# Altium PCB NUC970 DEV BOARD 1M52 LCD-20141215.PcbDoc
Units mil, origin at the board's own origin, x right, y up, seen from the top; angles counter-clockwise.
Board outline 5511.81 x 4015.75 mil, 2 copper layers (Top, Bottom), stack 12.7 mil thick; 39 components, 48 nets, 213 pads, 574 vias.
Unrouted connection lines stored in the file: 539.
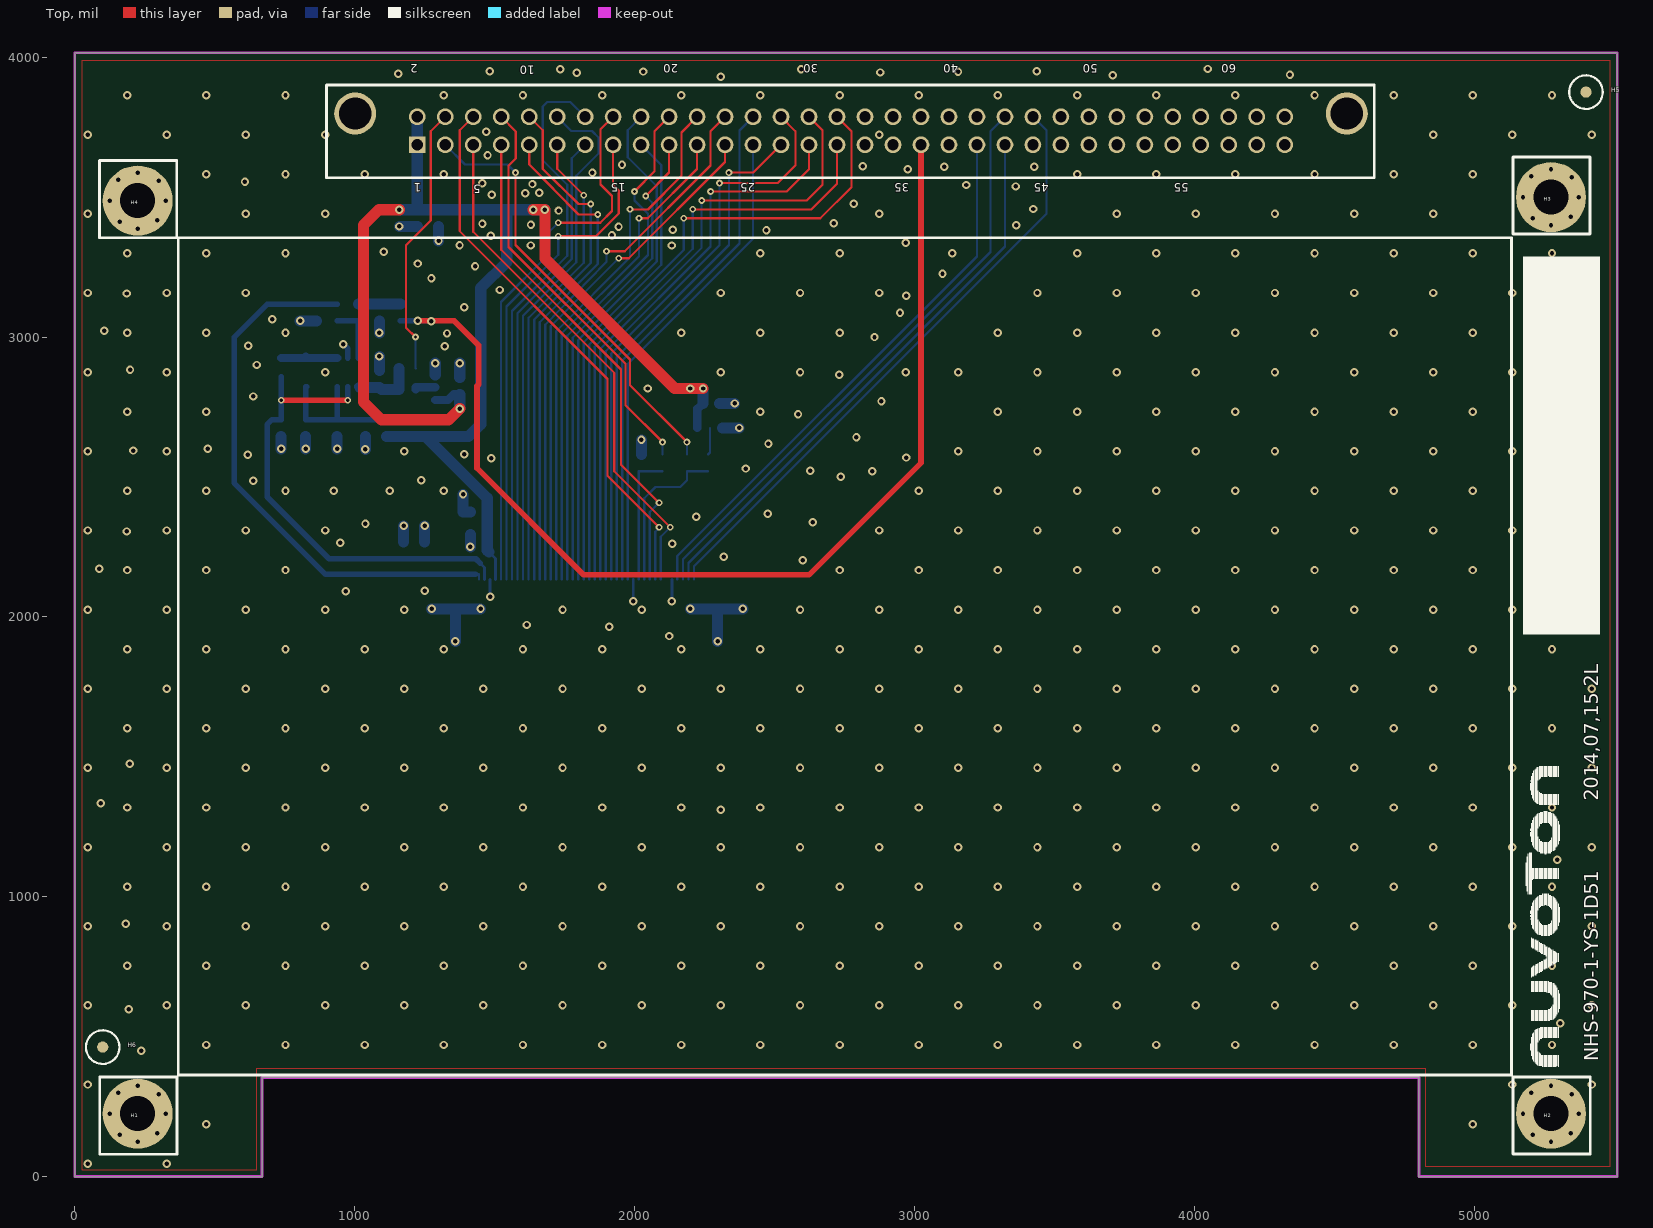
[diagram p0: Top view]
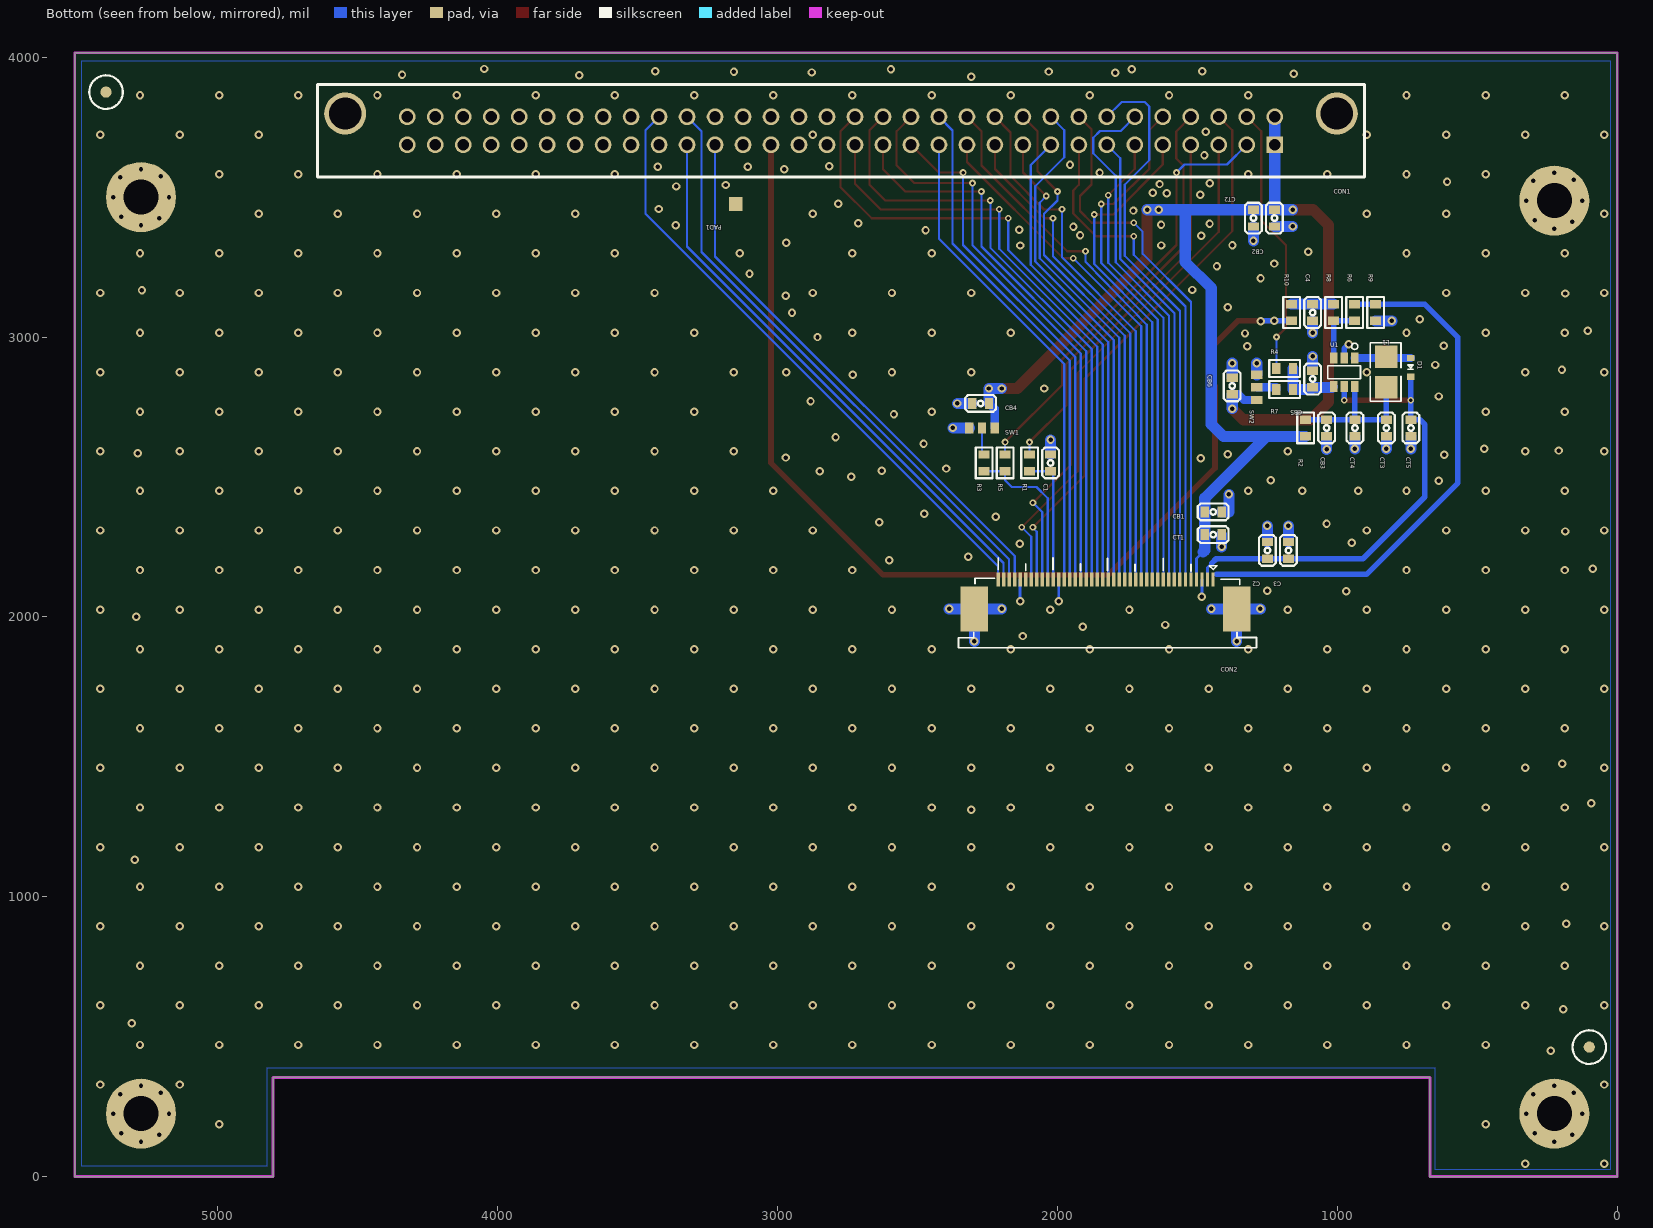
[diagram p1: Bottom view, seen from below]

## Layer stack, top to bottom
Solder Mask Top: solder mask 0.4, Solder Resist, Dk 3.5
Top: signal copper 1.35
Dielectric 1: dielectric 10, FR-4, Dk 4.3
Bottom: signal copper 1.35
Solder Mask Bottom: solder mask 0.4, Solder Resist, Dk 3.5

## Board outline
5511.81,0 5511.81,4015.75 0,4015.75 0,0 669.29,0 669.29,354.33 4803.15,354.33 4803.15,0

## Design rules (kind name [scope] priority, off if disabled: settings)
Clearance "Clearance - Default - DEFAULT - Via" [IsVia vs IsVia] p1: gap=6 ignorepadtopadclearanceinfootprint=FALSE
Clearance "Clearance - Default - DEFAULT- SMD" [IsVia vs IsSMTPin] p2: gap=6 ignorepadtopadclearanceinfootprint=FALSE
Clearance "Clearance - Default - DEFAULT - Net" [All] p3: gap=7 ignorepadtopadclearanceinfootprint=FALSE except(0: Arc-Hole Track-Hole SMDPad-Hole THPad-Hole Via-Hole Fill-Hole Poly-Hole Region-Hole Text-Hole; 10: Arc-Fill Arc-Poly Arc-Region Track-Fill Track-Poly Track-Region SMDPad-Fill SMDPad-Poly SMDPad-Region THPad-Fill THPad-Poly THPad-Region Via-Fill Via-Poly Via-Region Fill-Fill Fill-Poly Fill-Region Poly-Poly Poly-Region Region-Region Text-Text)
ComponentClearance "ComponentClearance - Default - DEFAULT" [All] p1: gap=6 collisioncheckmode=3 verticalgap=10 showdistances=FALSE
FanoutControl Fanout_SOIC [IsSOIC] p1: bgadir=Out bgaviamode=Centered fanoutstyle=Auto fanoutdirection=Alternating viagrid=1 // Fanout_SOIC (Default Rule)
FanoutControl Fanout_Small [(CompPinCount < 5)] p2: bgadir=Out bgaviamode=Centered fanoutstyle=Auto fanoutdirection=OutThenIn viagrid=1 // Fanout_Small (Default Rule)
FanoutControl Fanout_LCC [IsLCC] p3: bgadir=Out bgaviamode=Centered fanoutstyle=Auto fanoutdirection=Alternating viagrid=1 // Fanout_LCC (Default Rule)
FanoutControl Fanout_BGA [IsBGA] p4: bgadir=Out bgaviamode=Centered fanoutstyle=Auto fanoutdirection=Alternating viagrid=1 // Fanout_BGA (Default Rule)
HoleToHoleClearance "HoleToHoleClearance - Default - DEFAULT" [All] p1: gap=6 allowstackedmicrovias=TRUE
Length "Default Length" [All] p1: maxlimit=50000 minlimit=0
MaxMinImpedance "Default Impedance" [All] p1: minimum=50.00 maximum=150.0
ParallelSegment "Default Parallel Segment Adjasent" [All] p1: limit=1000 gap=200
ParallelSegment "Default Parallel Segment Same Layer" [All] p2: limit=1000 gap=200
PlaneConnect "Default PlaneConnect" [All] p1: planeconnectstyle=Relief reliefexpansion=20 reliefentries=0 reliefconductorwidth=15 reliefairgap=10
PolygonConnect "PolygonConnect - Default SMT" [IsSMTPin] p1: connectstyle=Relief reliefconductorwidth=10 reliefentries=4 polygonreliefangle="45 Angle" airgapwidth=10
PolygonConnect "PolygonConnect - Default Pad" [All] p2: connectstyle=Relief reliefconductorwidth=15 reliefentries=4 polygonreliefangle="45 Angle" airgapwidth=10
RoutingLayers "RoutingLayers - Default - DEFAULT" [All] p1: top layer_v5=TRUE bottom layer_v5=TRUE
RoutingPriority "RoutingPriority - Default - DEFAULT" [All] p1: routingpriority=3
RoutingTopology "Default Routing Topology" [All] p1: topology=Shortest
RoutingVias "RoutingVias - NetClass - POWER" [InNetClass('POWER') vs InNetClass('POWER')] p1: holewidth=16 width=30 viastyle="Through Hole" minholewidth=16 minwidth=30 maxholewidth=16 maxwidth=30
RoutingVias "RoutingVias - Default - DEFAULT" [All] p2: holewidth=12 width=24 viastyle="Through Hole" minholewidth=12 minwidth=24 maxholewidth=12 maxwidth=24
SMDToCorner "SMDToCorner - Default - DEFAULT" [All] p1: distance=60000
SolderMaskExpansion "SolderMaskExpansion from CAM settings" [All] p1: expansion=2
Width "Width - NetClass - POWER" [InNetClass('POWER')] p1: maxlimit=100 minlimit=1 preferedwidth=40
Width "Default Width" [All] p2: maxlimit=100 minlimit=1 preferedwidth=8
18 further rules are at their usual default settings.

## Classes and differential pairs
net class POWER: PWM VD33 VS

## Components (designator, comment, footprint, x,y, rotation, side; value= is the part's Value field where it differs from the comment)
C1 "C0603" C0603 2025,2550 r90 bottom
C2 "C0603" C0603 1250,2237.5 r90 bottom
C3 "C0603" C0603 1175,2237.5 r270 bottom
C4 "C0603" C0603 1088.5,3087.5 r90 bottom
CB1 "C0603" C0603 1443.75,2375 r180 bottom
CB2 "C0603" C0603 1225,3425 r270 bottom
CB3 "C0603" C0603 1038.5,2675 r270 bottom
CB4 "C0603" C0603 2275,2762.5 r0 bottom
CB5 "C0603" C0603 1088.5,2850 r90 bottom
CB6 "C0603" C0603 1376,2825 r90 bottom
CON1 "F_DIN_32X2$2F$2.54A" F_DIN_32X2$2F$2.54A 2773.78,3736.71 r0 bottom
CON2 "CON0.5MMX40" CON0.5MMX40 1828.54,2133.86 r0 bottom
CT1 "C0603" C0603 1443.75,2293.75 r180 bottom
CT2 "C0603" C0603 1300,3425 r270 bottom
CT3 "C0603" C0603 825,2675 r270 bottom
CT4 "C0603" C0603 937.5,2675 r270 bottom
CT5 "C0603" C0603 737.5,2675 r270 bottom
D1 "DIDEO_A" DIDEO_A 738.5,2925 r270 bottom
H1 "H-250" H-250 225,225 r0 top
H2 "H-250" H-250 5275,225 r0 top
H3 "H-250" H-250 5275,3500 r0 top
H4 "H-250" H-250 225,3487.5 r0 top
H5 "VIA40N(F_MASK)2L" VIA40N(F_MASK)2L 5400,3875 r0 top
H6 "VIA40N(F_MASK)2L" VIA40N(F_MASK)2L 100,462.5 r0 top
L1 "L1008" L1008 826,2875 r90 bottom
PAD1 "1PAD_1.25X1.25MM" 1PAD_1.25X1.25MM 3150,3475 r90 bottom
R1 "R0603" R0603 2100,2550 r90 bottom
R2 "R0603" R0603 1113.5,2675 r270 bottom
R3 "R0603" R0603 2262.5,2550 r90 bottom
R4 "R0603" R0603 1188.5,2887.5 r0 bottom
R5 "R0603" R0603 2187.5,2550 r90 bottom
R6 "R0603" R0603 938.5,3087.5 r270 bottom
R7 "R0603" R0603 1188.5,2812.5 r0 bottom
R8 "R0603" R0603 1013.5,3087.5 r90 bottom
R9 "R0603" R0603 863.5,3087.5 r90 bottom
R10 "R0603" R0603 1163.5,3087.5 r90 bottom
SW1 "PAD3P" PAD3P 2225,2675 r0 bottom
SW2 "PAD3P" PAD3P 1288.5,2775 r90 bottom
U1 "SOT-23-6" SOT-23-6 938.5,2925 r0 bottom

## Footprints (in the part's own frame and the unit in brackets; to place one, negate y for a bottom-side part, rotate by r counter-clockwise, add the part's x,y. Pads: shape width x height; smd on the part's side, far side on the other; paste and mask are expansions set on the pad)
1PAD_1.25X1.25MM [mm]
  rect 1.25x1.25 smd: \(0,0)
C0603 [mil]
  rect 30x40 smd: 1(-30,0) 2(30,0)
  silkscreen extent -55,-30 55,30
CON0.5MMX40 [mm]
  rect 0.3x1.25 smd: 1(-9.75,0) 2(-9.25,0) 3(-8.75,0) 4(-8.25,0) 5(-7.75,0) 6(-7.25,0) 7(-6.75,0) 8(-6.25,0) 9(-5.75,0) 10(-5.25,0) 11(-4.75,0) 12(-4.25,0) 13(-3.75,0) 14(-3.25,0) 15(-2.75,0) 16(-2.25,0) 17(-1.75,0) 18(-1.25,0) 19(-0.75,0) 20(-0.25,0) 21(0.25,0) 22(0.75,0) 23(1.25,0) 24(1.75,0) 25(2.25,0) 26(2.75,0) 27(3.25,0) 28(3.75,0) 29(4.25,0) 30(4.75,0) 31(5.25,0) 32(5.75,0) 33(6.25,0) 34(6.75,0) 35(7.25,0) 36(7.75,0) 37(8.25,0) 38(8.75,0) 39(9.25,0) 40(9.75,0)
  rect 2.5x4.1 smd: 41(-11.9,2.675) 42(11.9,2.675)
  silkscreen extent -13.7,-1.97 13.35,6.2
DIDEO_A [mil]
  rect 23x27 smd: 1(0,0) 2(67,0)
  silkscreen extent 25,-10 40,10
F_DIN_32X2$2F$2.54A [mil]
  rect 60x60 / inner round 60 / far side rect 60x60 hole 40: 1(-1550,50)
  round 60 hole 40: 2(-1550,-50) 3(-1450,50) 4(-1450,-50) 5(-1350,50) 6(-1350,-50) 7(-1250,50) 8(-1250,-50) 9(-1150,50) 10(-1150,-50) 11(-1050,50) 12(-1050,-50) 13(-950,50) 14(-950,-50) 15(-850,50) 16(-850,-50) 17(-750,50) 18(-750,-50) 19(-650,50) 20(-650,-50) 21(-550,50) 22(-550,-50) 23(-450,50) 24(-450,-50) 25(-350,50) 26(-350,-50) 27(-250,50) 28(-250,-50) 29(-150,50) 30(-150,-50) 31(-50,50) 32(-50,-50) 33(50,50) 34(50,-50) 35(150,50) 36(150,-50) 37(250,50) 38(250,-50) 39(350,50) 40(350,-50) 41(450,50) 42(450,-50) 43(550,50) 44(550,-50) 45(650,50) 46(650,-50) 47(750,50) 48(750,-50) 49(850,50) 50(850,-50) 51(950,50) 52(950,-50) 53(1050,50) 54(1050,-50) 55(1150,50) 56(1150,-50) 57(1250,50) 58(1250,-50) 59(1350,50) 60(1350,-50) 61(1450,50) 62(1450,-50) 63(1550,50) 64(1550,-50)
  round 150 hole 115: 65(-1771.65,-61.81) 66(1771.65,-61.81)
  silkscreen extent -1870,-165 1870,165
H-250 [mil]
  round 250 / inner round 200 / far side round 250 hole 125 unplated: 1(0,0)
  round 40 hole 16: 2(-100,0) 3(100,0) 4(0,100) 5(0,-100) 6(-65,-75) 7(70,-70) 8(-70,75) 9(75,70)
L1008 [mil]
  rrect0% 80x80 smd: 1(-55,0) 2(55,0)
  silkscreen extent -105,-53 105,57
PAD3P [mil]
  rect 30x40 smd: 1(0,0) 2(45,0) 3(90,0)
R0603 [mil]
  rect 30x40 smd: 1(-30,0) 2(30,0)
  silkscreen extent -55,-30 55,30
SOT-23-6 [mil]
  rect 27x39 smd: 1(0,0) 2(37.4,0) 3(74.8,0) 4(74.8,101.97) 5(37.4,102.36) 6(0,102.36)
  silkscreen extent -21,-53 96,74
VIA40N(F_MASK)2L [mil]
  round 40 / inner round 100 / far side round 40 all layers, no hole: 1(0,0)
  Top pour cut-out: 75,0 69.29,28.7 53.03,53.03 28.7,69.29 0,75 0,75 -28.7,69.29 -53.03,53.03 -69.29,28.7 -75,0 -75,0 -69.29,-28.7 -53.03,-53.03 -28.7,-69.29 0,-75 0,-75 28.7,-69.29 53.03,-53.03 69.29,-28.7 75,0
  Bottom pour cut-out: 75,0 69.29,28.7 53.03,53.03 28.7,69.29 0,75 0,75 -28.7,69.29 -53.03,53.03 -69.29,28.7 -75,0 -75,0 -69.29,-28.7 -53.03,-53.03 -28.7,-69.29 0,-75 0,-75 28.7,-69.29 53.03,-53.03 69.29,-28.7 75,0
  silkscreen extent -60,-60 60,60

## Via types
v1: diameter 30, hole 16, Top to Bottom, 548 vias
v2: diameter 24, hole 12, Top to Bottom, 26 vias

## Nets (pads, with @x,y where several pads share a name; then routed paths per layer and width w, separated by ;. In a path a pad name is that pad's centre, name@x,y a point inside that pad or via, vN(x,y) a via of type N, cw(c..) or ccw(c..) an arc to the next point about the centre after c; other vN are vias at no path point)
B0: CON1.32 CON2.21 | length 2348.7
  Top w8: v2(2176,3424) 2664,3424 2776,3536 2776,3734.49 CON1.32
  Bottom w8: CON2.21 1838.39,2972.94 2176,3310.56 v2(2176,3424)
B1: CON1.31 CON2.22 | length 2159.8
  Top w8: v2(2208,3456) 2632,3456 2723.78,3547.78 CON1.31
  Bottom w8: CON2.22 1858.07,2964.94 2208,3314.87 v2(2208,3456)
B2: CON1.30 CON2.23 | length 2222.1
  Top w8: v2(2240,3488) 2616,3488 2672,3544 2672,3738.49 CON1.30
  Bottom w8: CON2.23 1877.76,2956.94 2240,3319.19 v2(2240,3488)
B3: CON1.29 CON2.24 | length 2013
  Top w8: v2(2272,3520) 2544,3520 2623.78,3599.78 CON1.29
  Bottom w8: CON2.24 1897.44,2948.94 2272,3323.5 v2(2272,3520)
B4: CON1.28 CON2.25 | length 2068.7
  Top w8: v2(2304,3550) 2512.5,3550 2575,3612.5 2575,3735.49 CON1.28
  Bottom w8: CON2.25 1917.13,2940.94 2304,3327.82 v2(2304,3550)
B5: CON1.27 CON2.26 | length 1847
  Top w8: v2(2337.5,3587.5) 2424.57,3587.5 CON1.27
  Bottom w8: CON2.26 1936.81,2928.44 2337.5,3329.13 v2(2337.5,3587.5)
B6: CON1.26 CON2.27 | length 1846.4
  Bottom w8: CON2.27 1956.5,2915.94 2375,3334.45 2375,3737.93 CON1.26
B7: CON1.25 CON2.28 | length 1738.5
  Bottom w8: CON2.28 1976,2133.86 1976,2903.26 2423.78,3351.05 CON1.25
BLEN: CON1.4 R4.2 | length 971.4
  Top w8: v2(1217.5,3000) 1184,3033.5 1184,3328 1272,3416 1272,3734.93 CON1.4
  Bottom w8: v2(1217.5,3000) 1217.5,2888.5 R4.2
G0: CON1.24 CON2.13 | length 1955.9
  Top w8: v2(1900,3306.25) 1965.75,3306.25 2272,3612.5 2272,3734.93 CON1.24
  Bottom w8: CON2.13 1680.91,3043.75 1900,3269.09 v2(1900,3306.25)
G1: CON1.23 CON2.14 | length 1832.2
  Top w8: v2(1943.75,3281.25) 1980.03,3281.25 2323.78,3625 CON1.23
  Bottom w8: CON2.14 1700.59,3038.09 v2(1943.75,3281.25)
G2: CON1.22 CON2.15 | length 1898.9
  Top w8: v2(1984,3456) 2048,3456 2168,3576 2168,3730.93 CON1.22
  Bottom w8: CON2.15 1720.28,3020.94 1984,3284.67 v2(1984,3456)
G3: CON1.21 CON2.16 | length 1771.9
  Top w8: v2(2016,3424) 2047.78,3424 2223.78,3600 CON1.21
  Bottom w8: CON2.16 1739.96,3012.94 2016,3288.98 v2(2016,3424)
G4: CON1.20 CON2.17 | length 1843.4
  Top w8: v2(2000,3520) 2072,3592 2072,3734.93 CON1.20
  Bottom w8: CON2.17 1759.65,3004.94 2048,3293.3 2048,3440 2000,3488 v2(2000,3520)
G5: CON1.19 CON2.18 | length 1715.4
  Top w8: v2(2040,3504) 2123.78,3587.78 CON1.19
  Bottom w8: CON2.18 1779.33,2996.94 2064,3281.61 2064,3480 v2(2040,3504)
G6: CON1.18 CON2.19 | length 1832.1
  Bottom w8: CON2.19 1799.02,2988.94 2080,3269.93 2080,3538.5 1976,3642.5 1976,3738.93 CON1.18
G7: CON1.17 CON2.20 | length 1697.6
  Bottom w8: CON2.20 1818.7,2980.94 2096,3258.24 2096,3614.49 CON1.17
LCLK: CON1.8 R1.2 | length 1466.9
  Top w8: CON1.8 1576,3734.49 1576,3637.5 1550,3611.5 1550,3322 1968,2904 1968,2756.5 v2(2100,2624.5)
  Bottom w8: R1.2 v2(2100,2624.5)
LCS: CON1.3 R5.2 | length 1553.5
  Top w8: v2(1575,3587.5) 1575,3329 1984,2920 1984,2828 v2(2187.5,2624.5)
  Bottom w8: CON1.3 1394.49,3616 1546.5,3616 v2(1575,3587.5) ; R5.2 v2(2187.5,2624.5)
LD16: CON1.16 CON2.5 | length 1940.5
  Top w8: v2(1728,3408) 1878,3408 1920,3450 1920,3504 1879.08,3544.92 1879.08,3742.01 CON1.16
  Bottom w8: CON2.5 1523.43,3124.94 1696,3297.52 1696,3376 v2(1728,3408)
LD17: CON1.15 CON2.6 | length 1806.2
  Top w8: v2(1728,3360) 1862.75,3360 1944,3441.25 1944,3523.78 1923.78,3544 CON1.15
  Bottom w8: CON2.6 1543.11,3108.94 1728,3293.83 v2(1728,3360)
LD18: CON1.14 CON2.7 | length 1988.8
  Bottom w8: CON2.7 1562.8,3092.94 1760,3290.15 1760,3544 1672,3632 1672,3824 1688,3840 1770.49,3840 CON1.14
LD19: CON1.13 CON2.8 | length 1652.8
  Bottom w8: CON2.8 1582.48,3084.94 1776,3278.46 1776,3638.93 CON1.13
LD20: CON1.12 CON2.9 | length 1869.1
  Bottom w8: CON2.9 1602.17,3076.94 1792,3266.78 1792,3576.25 1872,3656.25 1872,3712 1848,3736 1774.49,3736 CON1.12
LD21: CON1.11 CON2.10 | length 1673.7
  Top w8: CON1.11 1723.78,3601.22 v2(1818.75,3506.25)
  Bottom w8: CON2.10 1621.85,3068.75 1818.75,3265.65 v2(1818.75,3506.25)
LD22: CON1.10 CON2.11 | length 1854.2
  Top w8: CON1.10 1672,3738.49 1672,3600 1800,3475 v2(1843.75,3475)
  Bottom w8: CON2.11 1641.54,3062.5 1843.75,3264.71 v2(1843.75,3475)
LD23: CON1.9 CON2.12 | length 1780
  Top w8: CON1.9 1623.78,3616 1799.78,3437.5 v2(1868.75,3437.5)
  Bottom w8: CON2.12 1661.22,3053.1 1868.75,3260.63 v2(1868.75,3437.5)
LDEN: CON1.5 CON2.34 | length 1858.5
  Top w8: CON1.5 1423.78,3376 1928,2871.78 1928,2520 v2(2128,2320)
  Bottom w8: CON2.34 2094.29,2286.29 v2(2128,2320)
LED+: C2.1 C3.2 CON2.2 CT5.1 D1.2 U1.5 | length 1680.5
  Top w20: v2(737.5,2774.5) v2(975.9,2774.5)
  Bottom w10: 1448.37,2192 1464.37,2176 CON2.2
  Bottom w20: v2(737.5,2774.5) v2@738.5,2774.5 ; D1.2 738.5,2818.75 v2@738.5,2774.5 ; v2(975.9,2774.5) U1.5 ; 1448.37,2192 1432.87,2207.5 C2.1 C3.2 909,2207.5 687.5,2429 687.5,2687.5 705,2705 CT5.1 738.5,2706 v2@738.5,2774.5
LED-: CON2.1 R6.1 R9.2 | length 1966.9
  Bottom w8: 1432,2152 1444.69,2152 CON2.1
  Bottom w20: R6.1 R9.2 688.5,3117.5 569.5,2998.5 569.5,2478.5 896,2152 1432,2152
LHSYNC: CON1.7 CON2.32 | length 1800.3
  Top w8: CON1.7 1523.78,3312 1952,2883.78 1952,2544 v2(2088,2408)
  Bottom w8: CON2.32 2054.92,2374.92 v2(2088,2408)
LVSYNC: CON1.6 CON2.33 | length 1973.1
  Top w8: CON1.6 1376,3738.93 1376,3378.34 1904,2850.34 1904,2504 v2(2088,2320)
  Bottom w8: CON2.33 2074.61,2304 2088,2317.39 v2(2088,2320)
N16195231: C1.1 CON2.30 R1.1 | length 470.6
  Bottom w8: CON2.30 2015.55,2520 C1.1 R1.1
N16195511: CON2.31 R3.1 R5.1 | length 575.9
  Bottom w8: CON2.31 2035.24,2424 2075.24,2464 2163.5,2464 2187.5,2488 R5.1 R3.1
N16195927: R3.2 SW1.2 | length 98.1
  Bottom w8: R3.2 2270,2587.5 SW1.2
N16198209: CB5.1 R4.1 R7.1 U1.4 | length 224.6
  Bottom w8: U1.4@1017.5,2823.03 U1.4@1020.53,2820
  Bottom w30: U1.4 U1.4@1017.5,2823.03 ; CB5.1 CB5.1@1089.5,2820
  Bottom w40: U1.4@1020.53,2820 CB5.1 ; CB5.1@1089.5,2820 1097,2812.5 R7.1 R4.1
N16198213: CB3.1 CT3.1 CT4.1 L1.1 R2.1 U1.6 | length 531.6
  Bottom w20: L1.1 828.64,2822.64 825,2822.64 CT3.1 CT4.1 ; U1.6 937.5,2821.64 CT4.1 ; R2.1 CB3.1 CT4.1
N16198391: R6.2 R8.1 U1.3 | length 207.5
  Bottom w20: R6.2 1013.11,3057.5 R8.1@1013.3,3057.3 ; U1.3 R8.1@1013.3,3057.3 ; R8.1 R8.1@1013.3,3057.3
N16198395: C4.2 R8.2 R10.2 | length 150
  Bottom w40: R8.2 C4.2 R10.2
N16198399: R7.2 SW2.2 | length 77.5
  Bottom w30: R7.2 1218.5,2820 SW2.2
N16198443: D1.1 L1.2 U1.1 | length 205
  Bottom w30: D1.1 L1.2@826,2925 ; L1.2 L1.2@826,2925 ; U1.1 L1.2@826,2925
PWM: CON1.37 R10.1 | length 3853.8
  Top w20: v1(1225.5,3057.5) 1356.25,3057.5 1443.75,2970 1443.75,2831.25 1437.5,2825 1437.5,2531.25 1818.75,2150 2623.78,2150 3023.78,2550 CON1.37
  Bottom w20: R10.1 v1(1225.5,3057.5) 1273.5,3057.5 v1(1274.5,3056.5)
TP1: CON1.46 CON2.40 | length 2194.6
  Bottom w8: CON2.40 2212.4,2180.4 3472,3440 3472,3738.49 CON1.46
TP2: CON1.44 CON2.38 | length 2129.5
  Bottom w8: CON2.38 2173.03,2205.03 3272,3304 3272,3734.93 CON1.44
TP3: CON1.41 CON2.37 | length 1996.2
  Bottom w8: CON2.37 2153.35,2217.35 3223.78,3287.78 CON1.41
TP4: CON1.43 CON2.39 | length 2021.4
  Bottom w8: CON2.39 2192.72,2192.72 3323.78,3323.78 CON1.43
VD33: CB1.1 CB2.1 CB4.1 CB6.1 CON1.1 CON1.2 CON2.4 CT1.1 CT2.1 R2.2 SW1.1 SW2.1 | length 5116.3
  Top w40: v1(1160,3455) 1087,3455 1032,3400 1032,2768 1096,2704 1336,2704 v1(1376,2744) ; v1(1637.96,3454.8) 1638.16,3455 v1(1680,3455) 1680,3280 2144,2816 v1(2200,2816) v1(2245,2816)
  Bottom w10: 1480,2231.74 1503.74,2208 CON2.4
  Bottom w30: SW2.1 1334,2775 1354,2795 CB6.1 ; SW1.1 2225,2744.5 2227,2744.5 CB4.1
  Bottom w40: R2.2 1253.75,2645 ; v1(1160,3455) CB2.1 ; CON1.2 CON1.1 1223.78,3456.22 CB2.1 ; v1(1376,2744) CB6.1 ; 1480,2231.74 1473.75,2237.99 CT1.1 CB1.1 1473.75,2425 1253.75,2645 ; v1(1680,3455) 1550,3455 ; v1(2200,2816) v1(2245,2816) CB4.1 ; CB2.1 CT2.1 1550,3455 ; 1253.75,2645 1407.49,2645 1450.49,2688 1450.49,3174.75 1544,3268.26 1544,3449 1550,3455
VS: C1.2 C2.2 C3.1 C4.1 CB1.2 CB2.2 CB3.2 CB4.2 CB5.2 CB6.2 CON1.39 CON1.40 CON1.47 CON1.48 CON2.3 CON2.29 CON2.36 CON2.41 CON2.42 CT1.2 CT2.2 CT3.2 CT4.2 CT5.2 R9.1 SW1.3 SW2.3 U1.2 | length 1822.3
  Bottom w10: v1(1484.06,2072) CON2.3 ; v1(1995.87,2056) CON2.29 ; v1(2133.66,2056) CON2.36
  Bottom w20: v1(959.9,2974.5) 975.9,2958.5 U1.2
  Bottom w40: v1(737.5,2600) CT5.2 ; v1(805.5,3057.5) R9.1 ; v1(825,2600) CT3.2 ; v1(937.5,2600) CT4.2 ; v1(1038.5,2598.5) CB3.2 ; CB5.2 v1(1088.5,2930.5) ; v1(1088.5,3014.5) C4.1 ; v1(1160,3395) CB2.2 ; C3.1 v1(1175,2325) ; C2.2 v1(1250,2325) ; v1(1275,2028.54) CON2.41 ; SW2.3 v1(1288.5,2906.5) ; v1(1300,3344) CT2.2 ; v1(1360.04,1912.5) CON2.41 ; CB6.2 v1(1376,2906.5) ; v1(1387.5,2437.5) 1387.5,2375 CB1.2 ; v1(1413.75,2250) CT1.2 ; v1(1450,2028.54) CON2.41 ; C1.2 v1(2025,2632.5) ; v1(2200,2028.54) CON2.42 ; v1(2297.05,1912.5) CON2.42 ; CB4.2 v1(2358,2762.5) ; SW1.3 v1(2374,2675) ; v1(2387.5,2028.54) CON2.42
  other v1: 46,46 328.84,46 470.26,187.42 4995.75,187.42 46,328.84 5137.17,328.84 5420.01,328.84 237.5,450 470.26,470.26 753.11,470.26 1035.95,470.26 1318.79,470.26 1601.64,470.26 1884.48,470.26 2167.32,470.26 2450.16,470.26 2733.01,470.26 3015.85,470.26 3298.69,470.26 3581.53,470.26 3864.38,470.26 4147.22,470.26 4430.06,470.26 4712.91,470.26 4995.75,470.26 5278.59,470.26 5308.71,548.53 193.11,597.77 46,611.69 328.84,611.69 611.69,611.69 894.53,611.69 1177.37,611.69 1460.21,611.69 1743.06,611.69 2025.9,611.69 2308.74,611.69 2591.58,611.69 2874.43,611.69 3157.27,611.69 3440.11,611.69 3722.96,611.69 4005.8,611.69 4288.64,611.69 4571.48,611.69 4854.33,611.69 5137.17,611.69 5420.01,611.69 187.42,753.11 470.26,753.11 753.11,753.11 1035.95,753.11 1318.79,753.11 1601.64,753.11 1884.48,753.11 2167.32,753.11 2450.16,753.11 2733.01,753.11 3015.85,753.11 3298.69,753.11 3581.53,753.11 3864.38,753.11 4147.22,753.11 4430.06,753.11 4712.91,753.11 4995.75,753.11 5278.59,753.11 46,894.53 328.84,894.53 611.69,894.53 894.53,894.53 1177.37,894.53 1460.21,894.53 1743.06,894.53 2025.9,894.53 2308.74,894.53 2591.58,894.53 2874.43,894.53 3157.27,894.53 3440.11,894.53 3722.96,894.53 4005.8,894.53 4288.64,894.53 4571.48,894.53 4854.33,894.53 5137.17,894.53 5420.01,894.53 182.06,903.56 187.42,1035.95 470.26,1035.95 753.11,1035.95 1035.95,1035.95 1318.79,1035.95 1601.64,1035.95 1884.48,1035.95 2167.32,1035.95 2450.16,1035.95 2733.01,1035.95 3015.85,1035.95 3298.69,1035.95 3581.53,1035.95 3864.38,1035.95 4147.22,1035.95 4430.06,1035.95 4712.91,1035.95 4995.75,1035.95 5278.59,1035.95 5297.14,1132.73 46,1177.37 328.84,1177.37 611.69,1177.37 894.53,1177.37 1177.37,1177.37 1460.21,1177.37 1743.06,1177.37 2025.9,1177.37 2308.74,1177.37 2591.58,1177.37 2874.43,1177.37 3157.27,1177.37 3440.11,1177.37 3722.96,1177.37 4005.8,1177.37 4288.64,1177.37 4571.48,1177.37 4854.33,1177.37 5137.17,1177.37 5420.01,1177.37 2308.76,1310.29 187.42,1318.79 470.26,1318.79 753.11,1318.79 1035.95,1318.79 1318.79,1318.79 1601.64,1318.79 1884.48,1318.79 2167.32,1318.79 2450.16,1318.79 2733.01,1318.79 3015.85,1318.79 3298.69,1318.79 3581.53,1318.79 3864.38,1318.79 4147.22,1318.79 4430.06,1318.79 4712.91,1318.79 4995.75,1318.79 5278.59,1318.79 93.64,1334.6 46,1460.21 328.84,1460.21 611.69,1460.21 894.53,1460.21 1177.37,1460.21 1460.21,1460.21 1743.06,1460.21 2025.9,1460.21 2308.74,1460.21 2591.58,1460.21 2874.43,1460.21 3157.27,1460.21 3440.11,1460.21 3722.96,1460.21 4005.8,1460.21 4288.64,1460.21 4571.48,1460.21 4854.33,1460.21 5137.17,1460.21 5420.01,1460.21 196.8,1474.6 187.42,1601.64 470.26,1601.64 753.11,1601.64 1035.95,1601.64 1318.79,1601.64 1601.64,1601.64 1884.48,1601.64 2167.32,1601.64 2450.16,1601.64 2733.01,1601.64 3015.85,1601.64 3298.69,1601.64 3581.53,1601.64 3864.38,1601.64 4147.22,1601.64 4430.06,1601.64 4712.91,1601.64 4995.75,1601.64 5278.59,1601.64 46,1743.06 328.84,1743.06 611.69,1743.06 894.53,1743.06 1177.37,1743.06 1460.21,1743.06 1743.06,1743.06 2025.9,1743.06 2308.74,1743.06 2591.58,1743.06 2874.43,1743.06 3157.27,1743.06 3440.11,1743.06 3722.96,1743.06 4005.8,1743.06 4288.64,1743.06 4571.48,1743.06 4854.33,1743.06 5137.17,1743.06 5420.01,1743.06 187.42,1884.48 470.26,1884.48 753.11,1884.48 1035.95,1884.48 1318.79,1884.48 1601.64,1884.48 1884.48,1884.48 2167.32,1884.48 2450.16,1884.48 2733.01,1884.48 3015.85,1884.48 3298.69,1884.48 3581.53,1884.48 3864.38,1884.48 4147.22,1884.48 4430.06,1884.48 4712.91,1884.48 4995.75,1884.48 5278.59,1884.48 2123.94,1931.46 1910.33,1964.43 1614.98,1971.02 5291.35,2000.35 46,2025.9 328.84,2025.9 611.69,2025.9 894.53,2025.9 1177.37,2025.9 1743.06,2025.9 2025.9,2025.9 2591.58,2025.9 2874.43,2025.9 3157.27,2025.9 3440.11,2025.9 3722.96,2025.9 4005.8,2025.9 4288.64,2025.9 4571.48,2025.9 4854.33,2025.9 5137.17,2025.9 5420.01,2025.9 967.7,2091.08 1251.32,2093.15 187.42,2167.32 470.26,2167.32 753.11,2167.32 2733.01,2167.32 3015.85,2167.32 3298.69,2167.32 3581.53,2167.32 3864.38,2167.32 4147.22,2167.32 4430.06,2167.32 4712.91,2167.32 4995.75,2167.32 5278.59,2167.32 87.66,2172.12 2601.05,2202.87 2319.51,2215.29 2135.27,2260.84 949.1,2265.06 185.99,2305.16 46,2308.74 328.84,2308.74 611.69,2308.74 894.53,2308.74 2874.43,2308.74 3157.27,2308.74 3440.11,2308.74 3722.96,2308.74 4005.8,2308.74 4288.64,2308.74 4571.48,2308.74 4854.33,2308.74 5137.17,2308.74 5420.01,2308.74 1038.84,2333.32 2637.5,2337.5 2220.15,2358.13 2476.84,2368.48 187.42,2450.16 470.26,2450.16 753.11,2450.16 925,2450 1125,2450 1318.79,2450.16 3015.85,2450.16 3298.69,2450.16 3581.53,2450.16 3864.38,2450.16 4147.22,2450.16 4430.06,2450.16 4712.91,2450.16 4995.75,2450.16 5278.59,2450.16 637.85,2486.94 1237.5,2487.5 2737.5,2500 2849.47,2519.61 2627.97,2521.68 2398.18,2529.96 1488.55,2566.75 2971.61,2569.29 618.07,2579.24 1392.07,2580.56 5286.32,2585.28 46,2591.58 328.84,2591.58 1177.37,2591.58 3157.27,2591.58 3440.11,2591.58 3722.96,2591.58 4005.8,2591.58 4288.64,2591.58 4571.48,2591.58 4854.33,2591.58 5137.17,2591.58 5420.01,2591.58 209.12,2594.36 475,2600 2478.91,2618.97 2793.29,2641.12 2584.49,2724.55 187.42,2733.01 470.26,2733.01 2450.16,2733.01 3298.69,2733.01 3581.53,2733.01 3864.38,2733.01 4147.22,2733.01 4430.06,2733.01 4712.91,2733.01 4995.75,2733.01 5278.59,2733.01 2882.59,2770.09 637.5,2787.5 2048,2816 2731.47,2865.32 46,2874.43 328.84,2874.43 894.53,2874.43 2308.74,2874.43 2591.58,2874.43 2969.54,2873.6 3157.27,2874.43 3440.11,2874.43 3722.96,2874.43 4005.8,2874.43 4288.64,2874.43 4571.48,2874.43 4854.33,2874.43 5137.17,2874.43 5420.01,2874.43 197.55,2883.57 650,2900 1322.52,2967 619.39,2968.22 2857.75,2999.88 1330.16,3012.69 187.42,3015.85 470.26,3015.85 753.11,3015.85 2167.32,3015.85 2450.16,3015.85 2733.01,3015.85 3298.69,3015.85 3581.53,3015.85 3864.38,3015.85 4147.22,3015.85 4430.06,3015.85 4712.91,3015.85 4995.75,3015.85 5278.59,3015.85 105.01,3022.39 705.09,3063.15 2948.84,3086.83 1392.14,3106.31 2971.51,3147.53 185.99,3155.42 46,3157.27 328.84,3157.27 611.69,3157.27 2308.74,3157.27 2591.58,3157.27 2874.43,3157.27 3440.11,3157.27 3722.96,3157.27 4005.8,3157.27 4288.64,3157.27 4571.48,3157.27 4854.33,3157.27 5137.17,3157.27 5420.01,3157.27 5271.59,3167.38 1518.88,3168.02 1274.62,3210.15 3100.72,3225.33 1430.38,3252.67 1225,3262.5 187.42,3298.69 470.26,3298.69 753.11,3298.69 2450.16,3298.69 2733.01,3298.69 3135.12,3298.57 3581.53,3298.69 3864.38,3298.69 4147.22,3298.69 4430.06,3298.69 4712.91,3298.69 4995.75,3298.69 5278.59,3298.69 1104,3304 1629.45,3327.02 2133.2,3326.96 1375,3328 2968.87,3336.09 1486.34,3362.01 1919.64,3363.62 2471.77,3380.92 2137.34,3382.86 1943.17,3393.58 3364.44,3399.38 1630.29,3400.93 1456.92,3404.27 2711.75,3405.97 46,3440.11 611.69,3440.11 894.53,3440.11 2874.43,3440.11 3722.96,3440.11 4005.8,3440.11 4288.64,3440.11 4571.48,3440.11 4854.33,3440.11 1728.66,3451.88 3425.09,3457.4 2784.27,3475.86 1490.62,3508.59 1609.29,3514.31 1660.19,3515.01 3361.8,3537.83 3185.11,3543.1 1635.58,3546.57 1455.85,3549.24 608.23,3554.53 470.26,3581.53 753.11,3581.53 1035.95,3581.53 1318.79,3581.53 3581.53,3581.53 3864.38,3581.53 4147.22,3581.53 4430.06,3581.53 4712.91,3581.53 4995.75,3581.53 1850,3587.5 2976.78,3599.8 3429.05,3607.71 3107.32,3609.03 2815.91,3610.35 1955.48,3615.57 1475,3650 46,3722.96 328.84,3722.96 611.69,3722.96 894.53,3722.96 2874.43,3722.96 4854.33,3722.96 5137.17,3722.96 5420.01,3722.96 1470.29,3733.8 187.42,3864.38 470.26,3864.38 753.11,3864.38 1318.79,3864.38 1601.64,3864.38 1884.48,3864.38 2167.32,3864.38 2450.16,3864.38 2733.01,3864.38 3015.85,3864.38 3298.69,3864.38 3581.53,3864.38 3864.38,3864.38 4147.22,3864.38 4430.06,3864.38 4712.91,3864.38 4995.75,3864.38 5278.59,3864.38 2307.8,3930.17 3708.89,3934.93 4342.36,3937 1155.37,3940.72 1793.56,3944.67 2878.76,3945.28 3156.16,3947.35 2030.9,3948.63 3437.7,3949.42 1482.37,3949.95 1735.54,3956.54 2595.24,3956.54 4048.4,3957.7
pads on no net: CON1.33 CON1.34 CON1.35 CON1.36 CON1.38 CON1.42 CON1.45 CON1.49 CON1.50 CON1.51 CON1.52 CON1.53 CON1.54 CON1.55 CON1.56 CON1.57 CON1.58 CON1.59 CON1.60 CON1.61 CON1.62 CON1.63 CON1.64 CON1.65 CON1.66 CON2.35 H1.1 H1.2 H1.3 H1.4 H1.5 H1.6 H1.7 H1.8 H1.9 H2.1 H2.2 H2.3 H2.4 H2.5 H2.6 H2.7 H2.8 H2.9 H3.1 H3.2 H3.3 H3.4 H3.5 H3.6 H3.7 H3.8 H3.9 H4.1 H4.2 H4.3 H4.4 H4.5 H4.6 H4.7 H4.8 H4.9 H5.1 H6.1 PAD1.\

## Polygon pours and split planes (outlines as drawn)
VS on Top (solid, remove dead copper, pour order 0): 25,3987.5 25,25 650,25 650,387.5 4825,387.5 4825,37.5 5487.5,37.5 5487.5,3987.5
VS on Bottom (solid, remove dead copper, pour order 2): 25,3987.5 25,25 650,25 650,387.5 4825,387.5 4825,37.5 5487.5,37.5 5487.5,3987.5

## Keep-outs
Keep-Out Layer:
  the board outline again, w10

## Other copper
Top:
  text "NUC970 DEV BOARD 1M52 LCD" at 5000,-687.5 h32.5
  text "20141215" at 5600,-750 h32.5
  text "ARTWORK-TOP" at 5130,-880 h50
  text "20141215" at 5025,-1025 h50
Bottom:
  text "ARTWORK-BTM" at 5730,-880 h50
Multi-Layer:
  lines w10: 4462.5,-1073.23 4462.5,-628.23 ; 4462.5,-925 5900,-925 ; 4462.5,-775 5900,-775 ; 4975,-1070 4975,-630 ; 5465,-1070 5465,-925 ; 5900,-1075 5900,6725 -5300,6725 -5300,-1075 5900,-1075 ; 5900,-1075 5900,-625 3295,-625 3295,-1075 5900,-1075
  text "蔼ひм()そ" at 3495,-720 h50
  text "JOB NAME" at 4487.5,-735.68 h50
  text "Gao-Fu Technology Corp." at 3380,-830 h50
  text "LAYER" at 4581.25,-885.68 h50
  text "http://www.gaofu.com.tw" at 3485,-930 h40
  text "DATE" at 4600,-1029.43 h50
  text "2 LAYER" at 5505,-1035 h50
  text "886-3-6682475" at 3640,-1040 h40

## Silkscreen, mask and mechanical layers (free items; w line width, h text height)
Silkscreen Top:
  drawing of 314 lines, arcs and shapes, not listed
  text "2" at 1225,3975 h30 r180
  text "20" at 2156.25,3975 h30 r180
  text "30" at 2656.25,3975 h30 r180
  text "40" at 3156.25,3975 h30 r180
  text "50" at 3656.25,3975 h30 r180
  text "60" at 4150,3975 h30 r180
  text "10" at 1643.75,3968.75 h30 r180
  text "1" at 1237.5,3550 h30 r180
  text "15" at 1968.75,3550 h30 r180
  text "25" at 2431.25,3550 h30 r180
  text "35" at 2981.25,3550 h30 r180
  text "45" at 3481.25,3550 h30 r180
  text "55" at 3981.25,3550 h30 r180
  text "5" at 1450,3543.75 h30 r180
  text "2014,07,15 2L" at 5443.75,1343.75 h50 r90
  text "NHS-970-1-YS-1D51" at 5443.75,412.5 h50 r90
  text "SILKSCREEN-TOP" at 5080,-880 h50
Silkscreen Bottom:
  text "SILKSCREEN-BTM" at 5780,-880 h50
Paste Mask Top:
  text "SMD Paste Mask-TOP" at 5080,-880 h40
Paste Mask Bottom:
  text "SMD Paste Mask-BTM" at 5080,-880 h40
Solder Mask Top:
  text "SOLDER MASK-TOP" at 5030,-880 h50
Solder Mask Bottom:
  text "SOLDER MASK-BTM" at 5830,-880 h50
Assembly Drawing Bottom:
  text "Evonne" at 3325,-1050 h50
Drill Drawing:
  lines w1: 5511.81,4015.75 5511.84,4015.75 ; 5511.81,4094.49 5511.84,4094.49 ; 669.29,354.33 669.32,354.33 ; 669.29,354.33 669.32,354.33 ; 4803.15,354.33 4803.18,354.33 ; 4803.15,354.33 4803.18,354.33 ; 0,0 0.03,0 ; 0,4015.75 0.03,4015.75 ; 0,4094.49 0.03,4094.49 ; 903.7,3902.06 903.73,3902.06 ; 5511.81,0 5511.84,0 5511.81,0
  lines w10: -138,3902.06 853.7,3902.06 ; -138,4015.75 -50,4015.75 ; -88,3752.06 -88,3902.06 ; -88,4165.75 -88,4015.75 ; 0,-168.11 0,-50 ; 0,4144.49 0,4212.5 ; 669.29,-168.11 669.29,304.33 669.29,107.48 ; 2481.22,157.48 669.29,157.48 ; 2500.91,4162.5 0,4162.5 ; 2991.22,157.48 4803.15,157.48 ; 3010.91,4162.5 5511.81,4162.5 ; 4803.15,-207.48 4803.15,304.33 4803.15,107.48 ; 5511.81,-207.48 5511.81,-50 ; 5511.81,4144.49 5511.81,4212.5 ; 5561.81,0 5690,0 ; 5561.81,4015.75 5690,4015.75 ; 5640,1730.27 5640,0 ; 5640,2238 5640,4015.75 ; -88,3902.06 -113,3802.06 -63,3802.06 -88,3902.06 ; -88,4015.75 -63,4115.75 -113,4115.75 -88,4015.75 ; 0,-118.11 100,-143.11 100,-93.11 0,-118.11 ; 0,-118.11 669.29,-118.11 ; 0,4162.5 100,4137.5 100,4187.5 0,4162.5 ; 669.29,-118.11 569.29,-93.11 569.29,-143.11 669.29,-118.11 ; 669.29,157.48 769.29,132.48 769.29,182.48 669.29,157.48 ; 4803.15,-157.48 4903.15,-182.48 4903.15,-132.48 4803.15,-157.48 ; 4803.15,-157.48 5511.81,-157.48 ; 4803.15,157.48 4703.15,182.48 4703.15,132.48 4803.15,157.48 ; 5511.81,-157.48 5411.81,-132.48 5411.81,-182.48 5511.81,-157.48 ; 5511.81,4162.5 5411.81,4187.5 5411.81,4137.5 5511.81,4162.5 ; 5640,0 5665,100 5615,100 5640,0 ; 5640,4015.75 5615,3915.75 5665,3915.75 5640,4015.75
  text "2.888mm" at -481.64,4128.25 h50
  text "140.000mm" at 2530.91,4125 h50
  text "102.000mm" at 5616,2208 h50 r270
  text "105.000mm" at 2511.22,119.98 h50
  text "17.000mm" at 78.74,-236.22 h50
  text "18.000mm" at 4921.26,-275.59 h50
  text "DRILL DRAWING" at 5130,-880 h50